# Altium PCB XRACER-R07.pcbdoc (part 1 of 2)
Units mm, origin at the board's own origin, x right, y up, seen from the top; angles counter-clockwise.
Board outline 50.7 x 52.3 mm, 4 copper layers (Top Layer, 2, 3, Bottom Layer); 135 components, 122 nets, 557 pads, 407 vias.
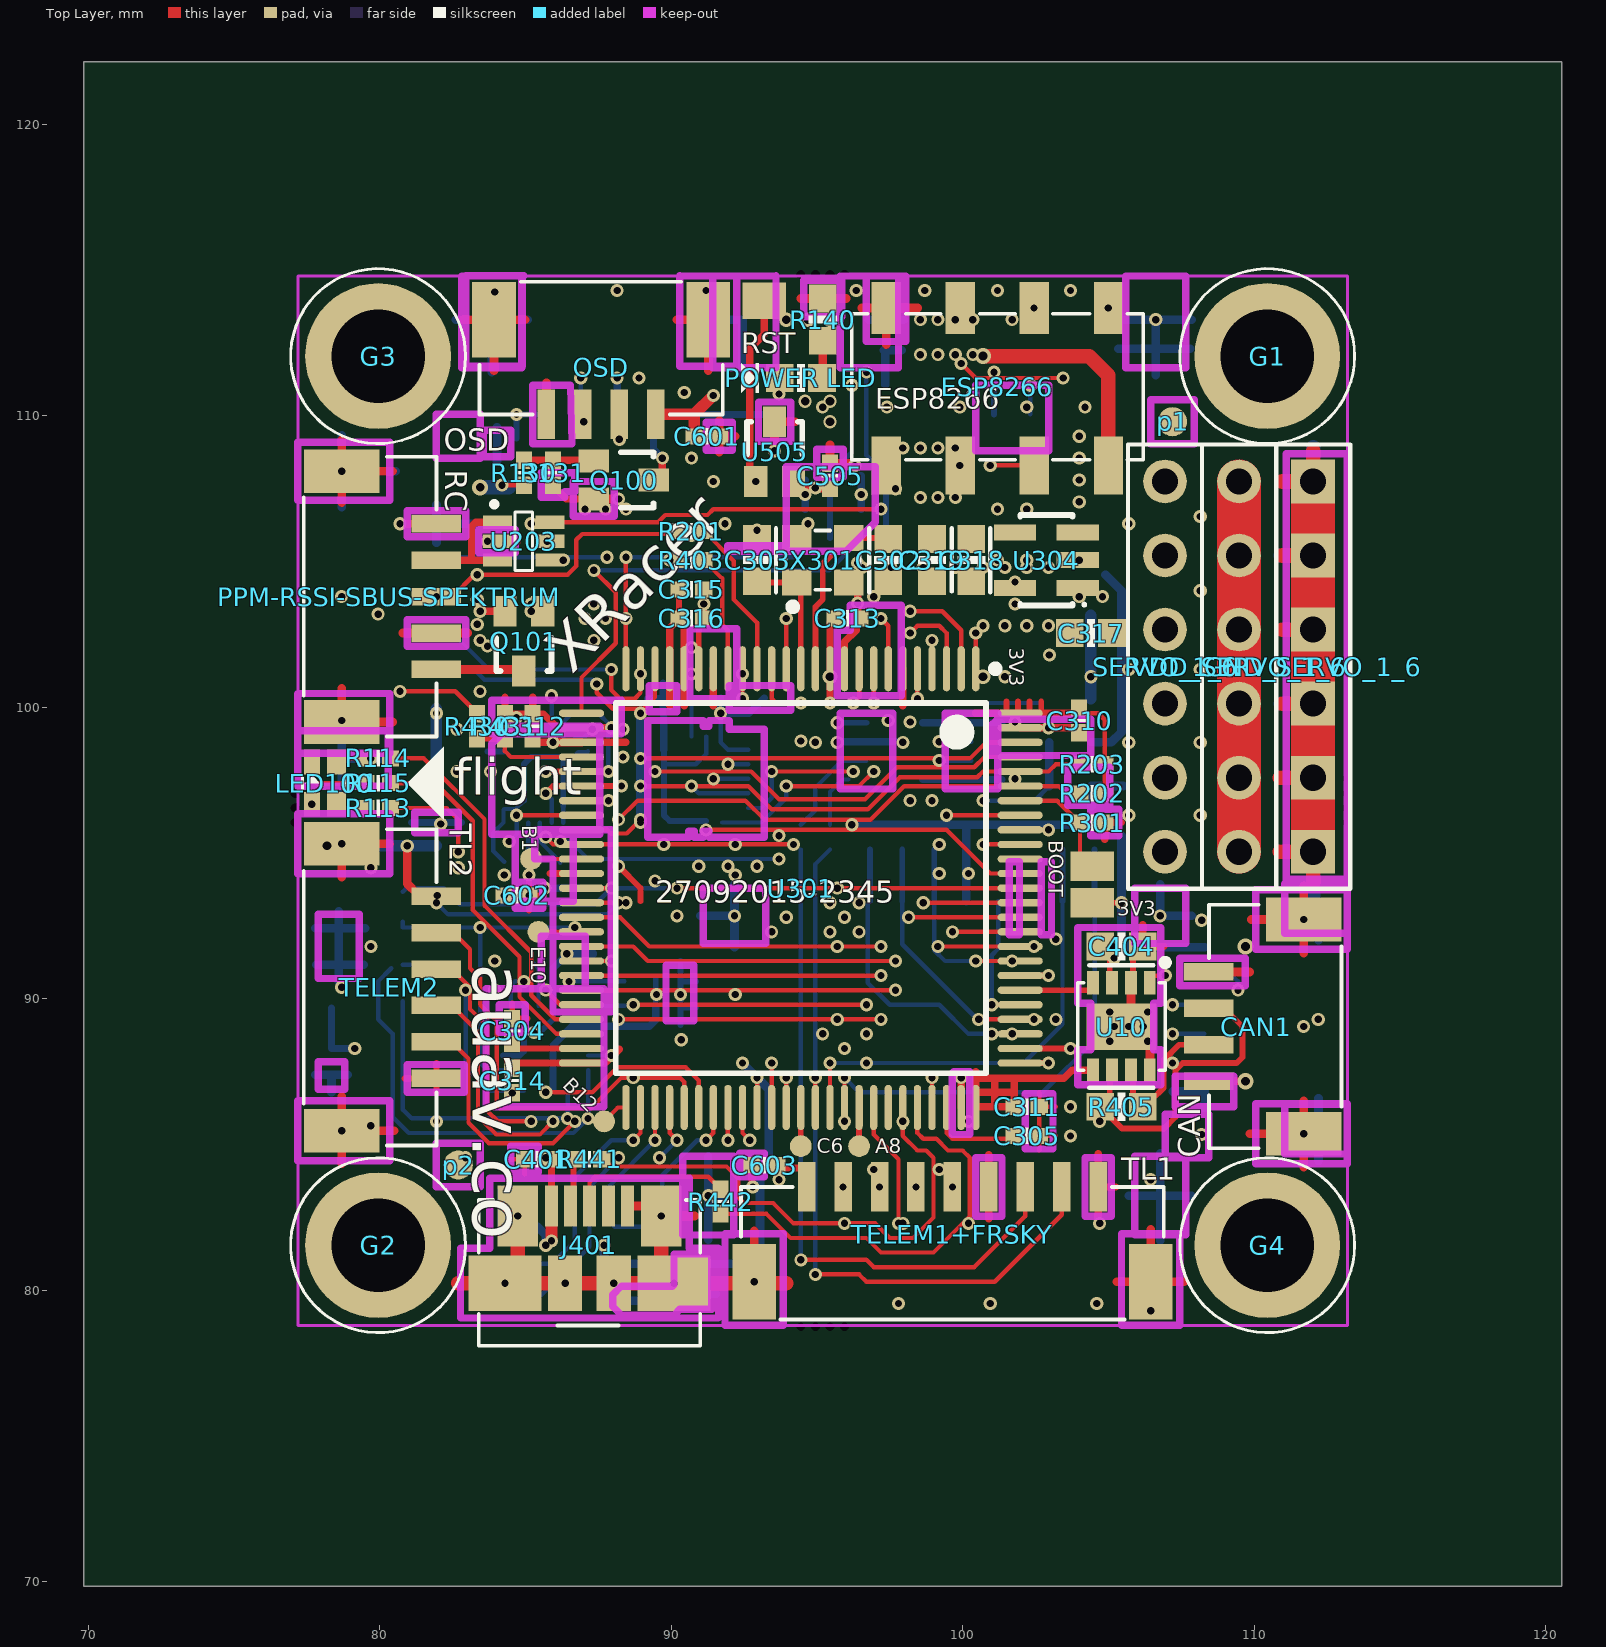
[diagram p0: Top Layer view]
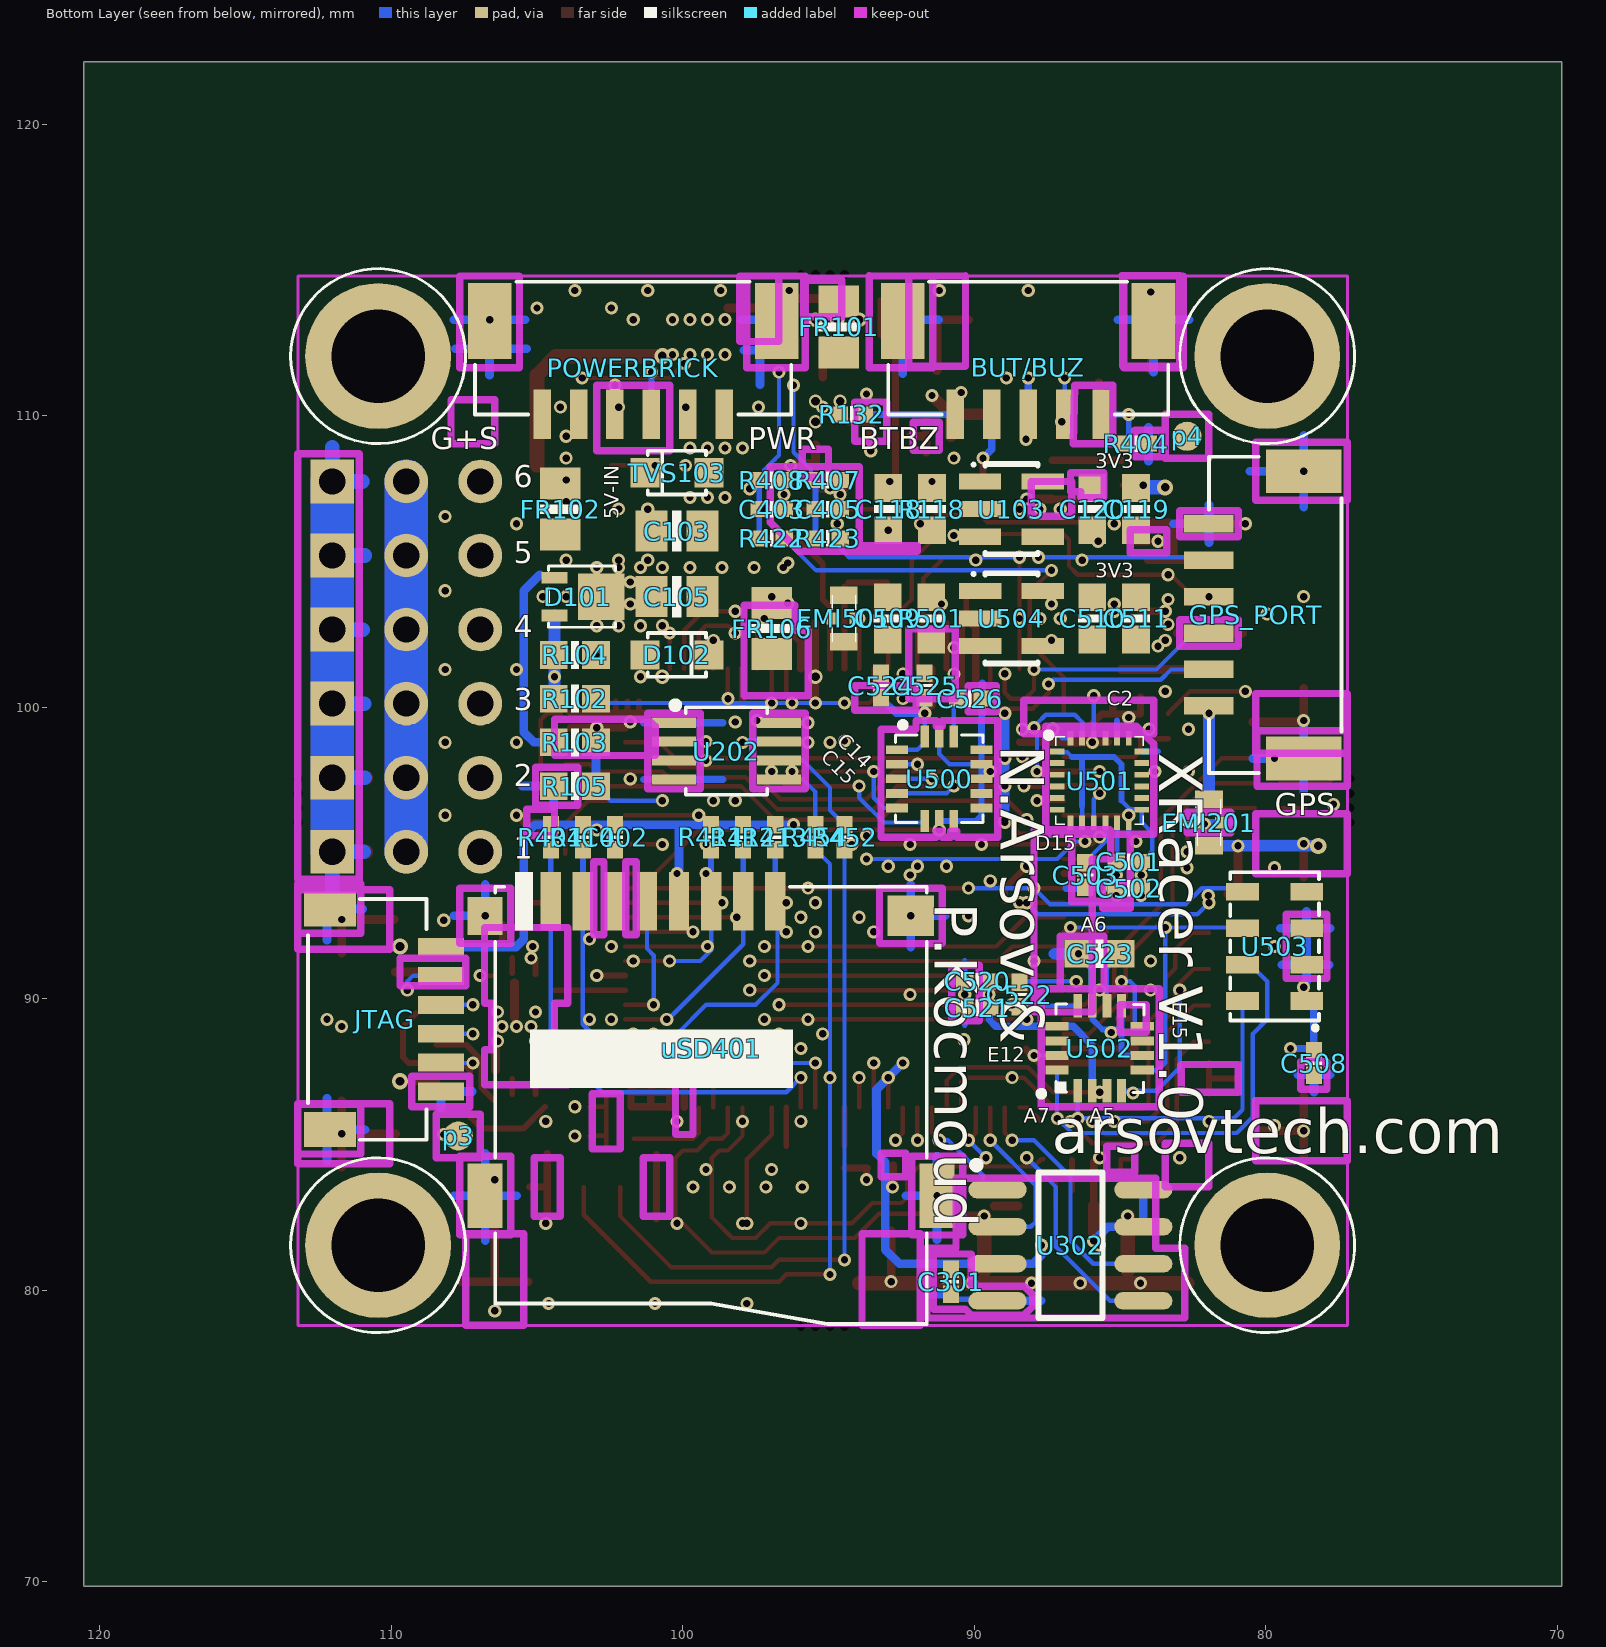
[diagram p1: Bottom Layer view, seen from below]
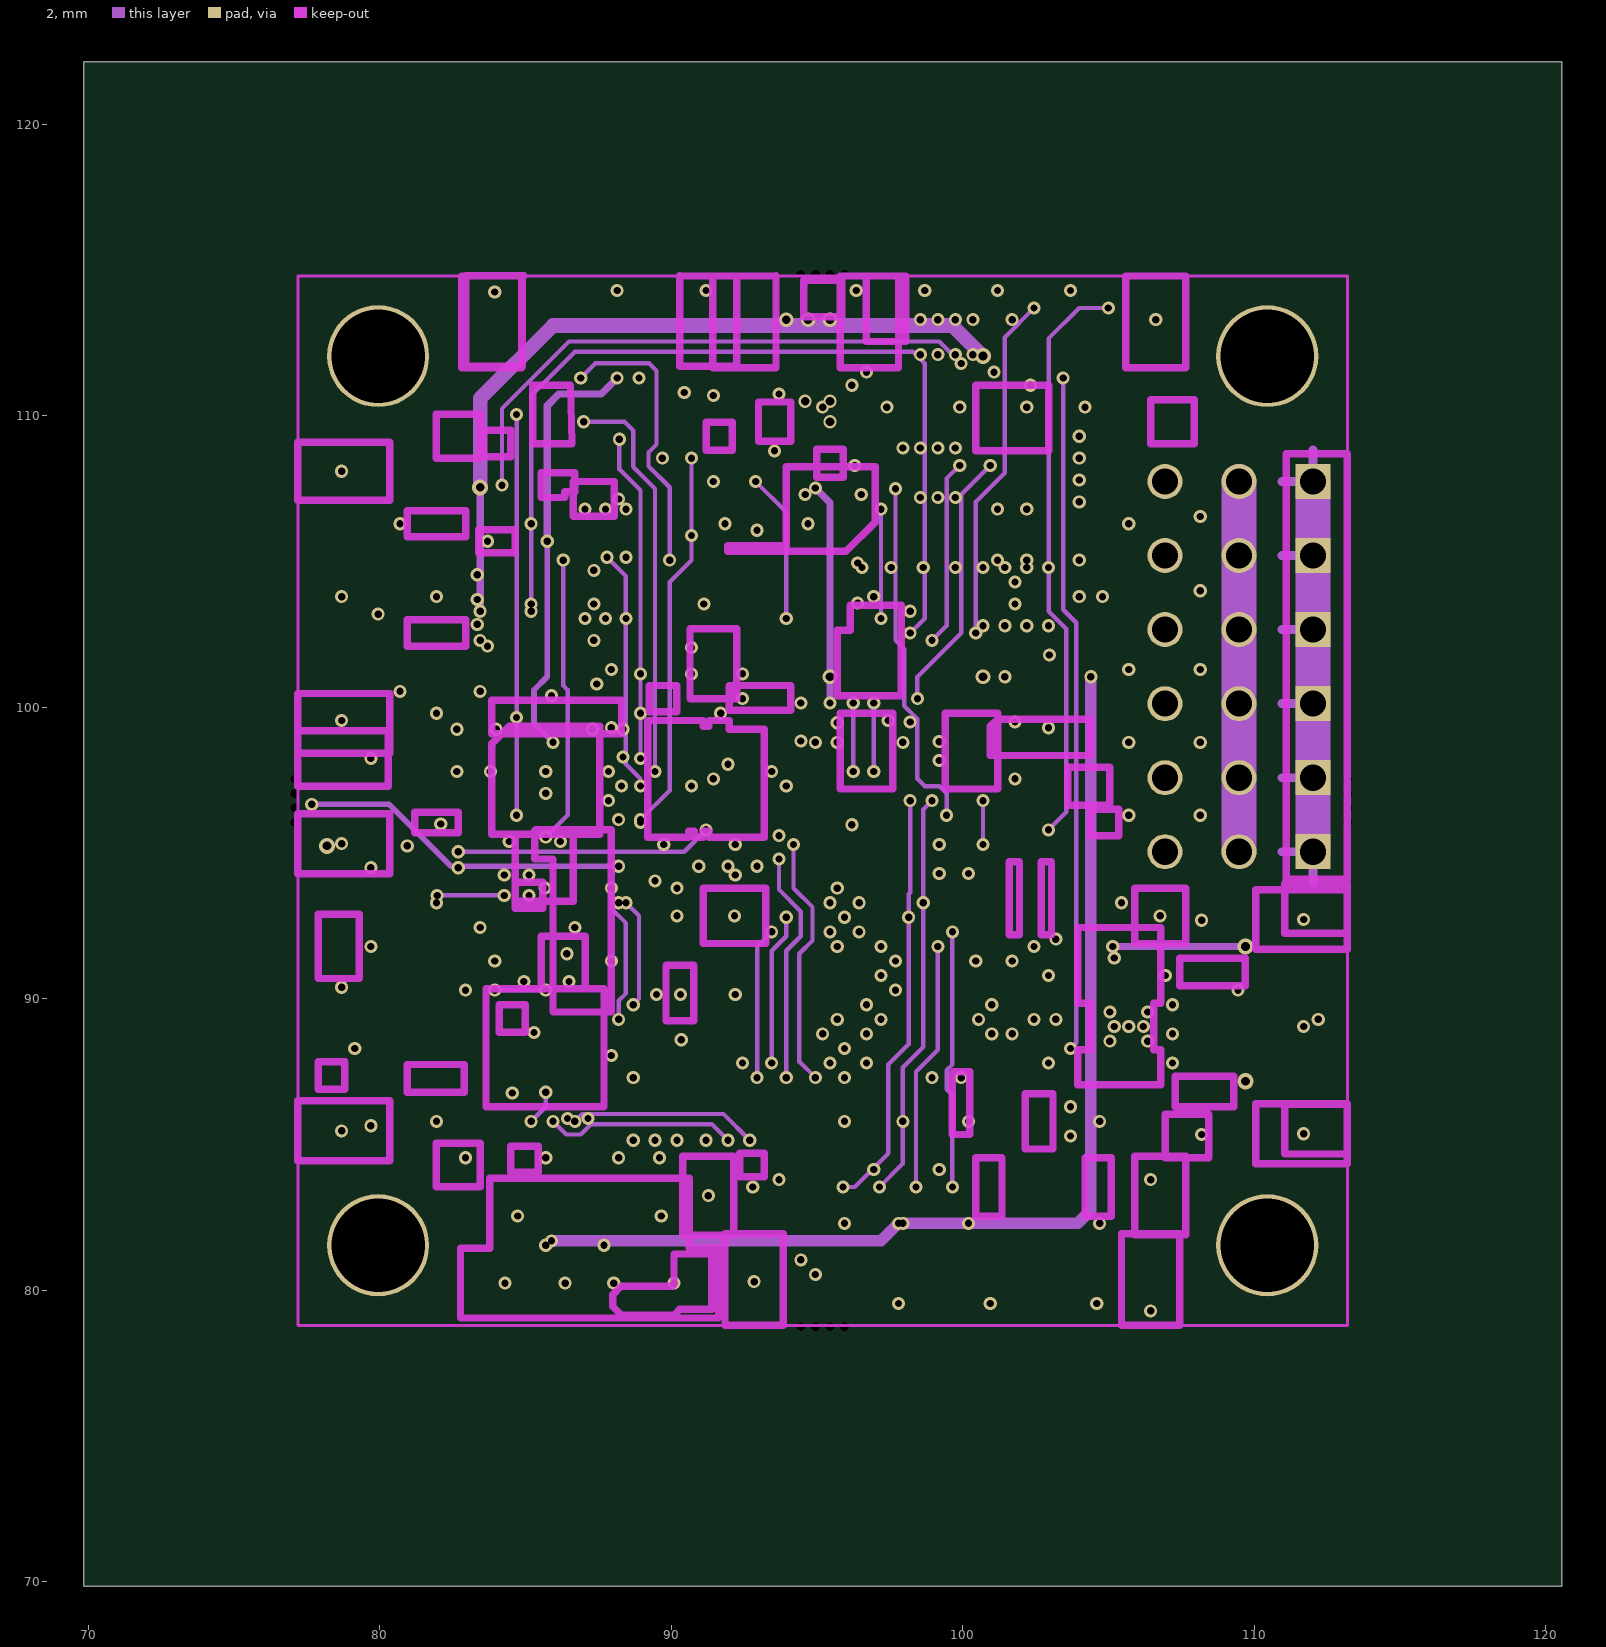
[diagram p2: 2]
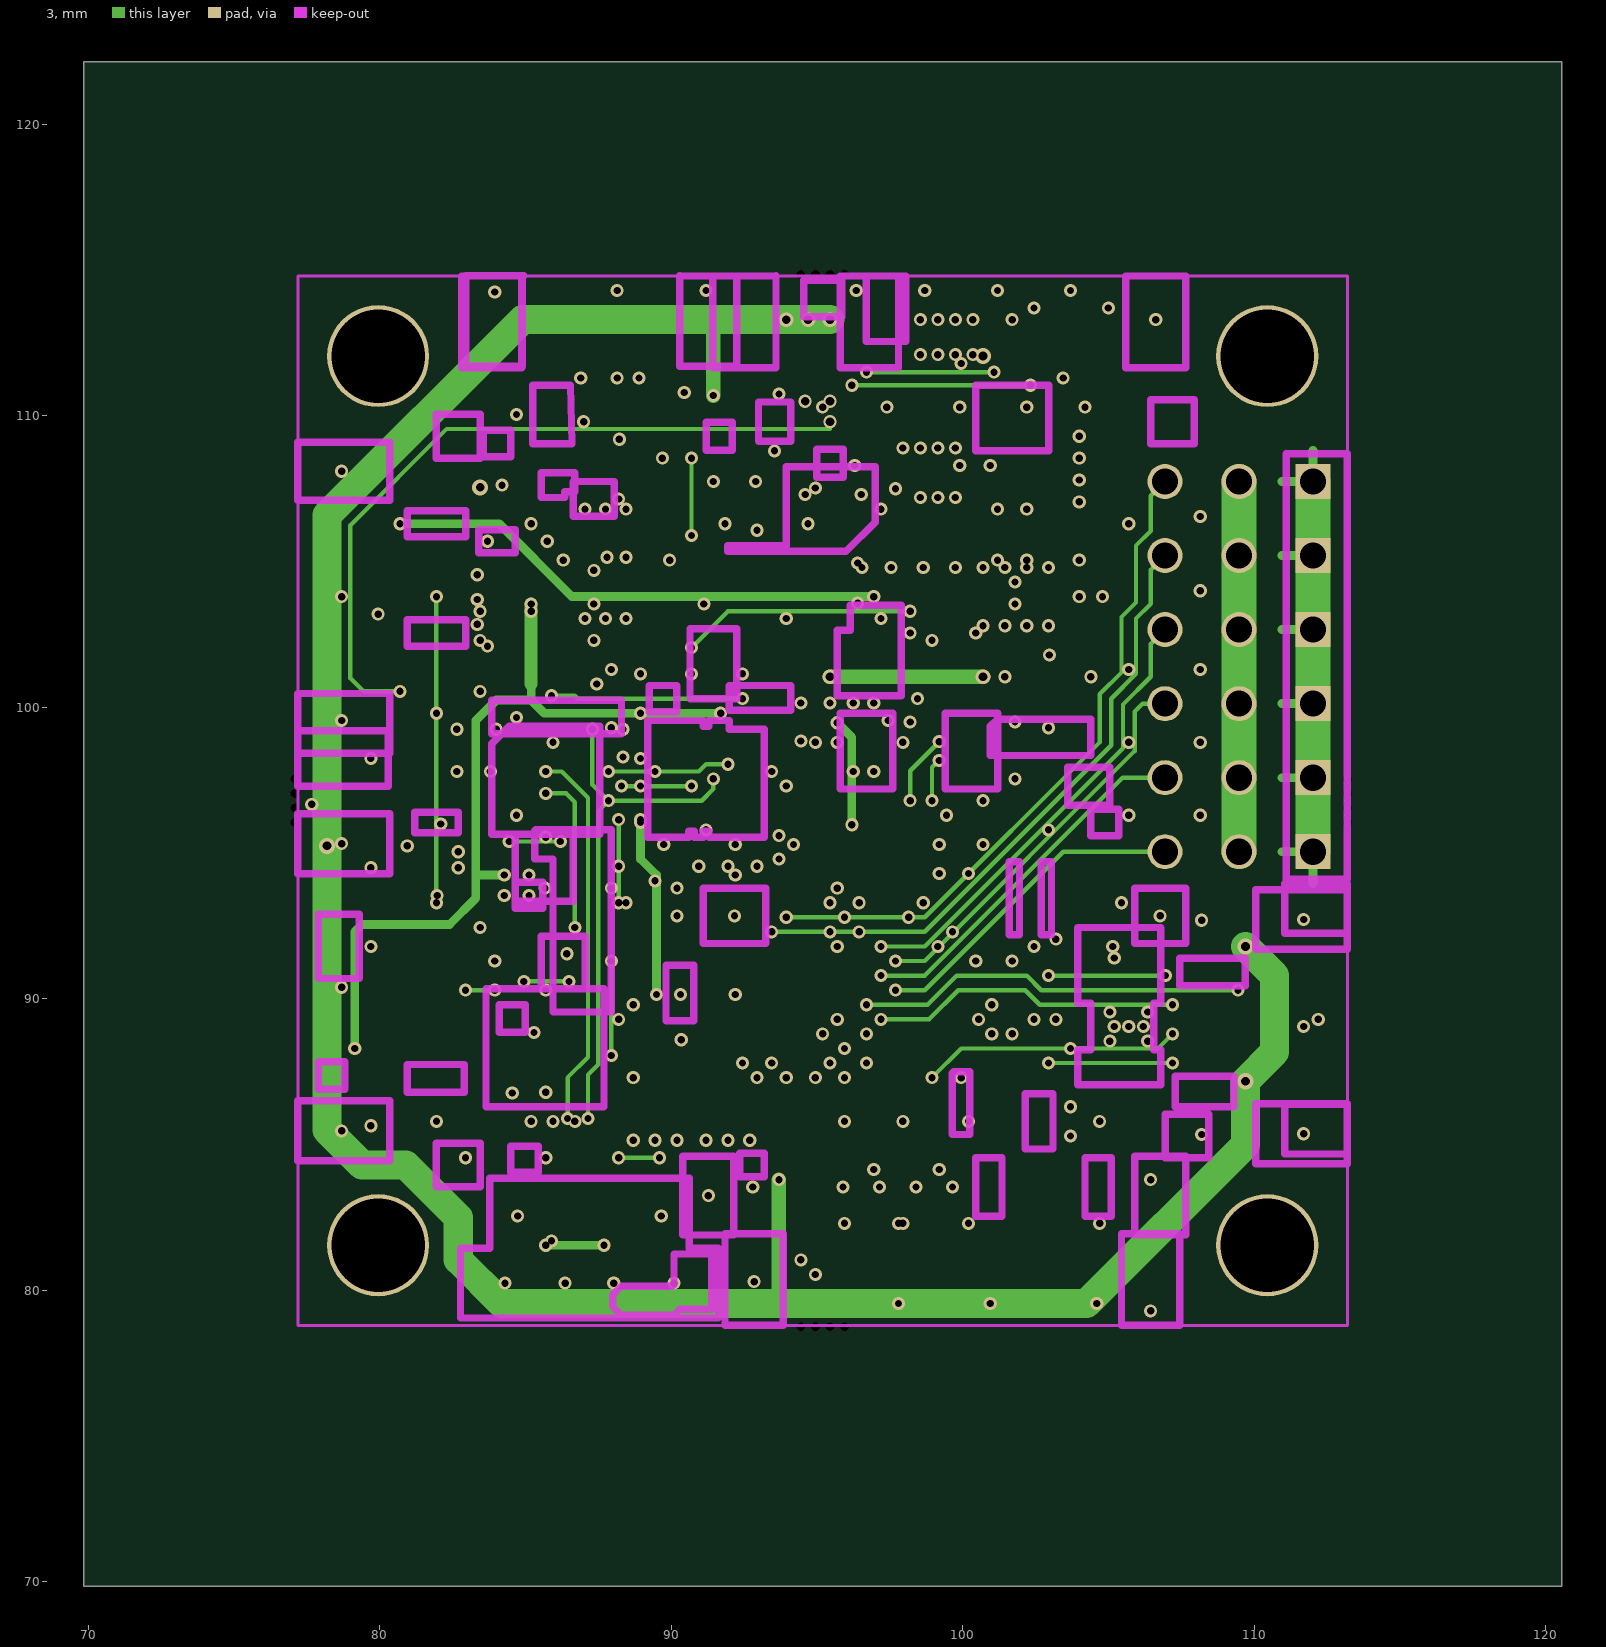
[diagram p3: 3]

## Layer stack, top to bottom
Top Layer: signal copper (thickness not stored)
Dielectric: dielectric 0.32, FR-4, Dk 4.8
2: signal copper (thickness not stored)
Dielectric: dielectric 0.32, FR-4, Dk 4.8
3: signal copper (thickness not stored)
Dielectric: dielectric 0.32, FR-4, Dk 4.8
Bottom Layer: signal copper (thickness not stored)

## Board outline
120.55,69.85 69.85,69.85 69.85,122.15 120.55,122.15

## Design rules (kind name [scope] priority, off if disabled: settings)
BoardOutlineClearance Clearance [All] p0: genericclearance=0.254 ignorepadtopadclearanceinfootprint=FALSE except(0: Arc-SplitContinuation Track-SplitContinuation SMDPad-SplitContinuation THPad-SplitContinuation Via-SplitContinuation Fill-SplitContinuation Poly-SplitContinuation Region-SplitContinuation Text-SplitContinuation; 0.15: Track-OutlineEdge SMDPad-OutlineEdge THPad-OutlineEdge Via-OutlineEdge Fill-OutlineEdge Poly-OutlineEdge Text-OutlineEdge Hole-OutlineEdge; 0.254: Region-OutlineEdge Sheet-OutlineEdge Track-CutoutEdge SMDPad-CutoutEdge THPad-CutoutEdge Via-CutoutEdge Fill-CutoutEdge Region-CutoutEdge Poly-CutoutEdge Text-CutoutEdge Sheet-CutoutEdge Hole-CutoutEdge)
Clearance [All] p1: gap=0.178 ignorepadtopadclearanceinfootprint=FALSE except(0.15: Sheet-Track Sheet-SMDPad Sheet-THPad Sheet-Via Sheet-Fill Sheet-Poly Sheet-Text Track-Sheet SMDPad-Sheet THPad-Sheet Via-Sheet Fill-Sheet Poly-Sheet Text-Sheet Hole-Sheet Sheet-Hole; 0.254: Track-Track SMDPad-Track THPad-Track Via-Track Fill-Track Region-Track Poly-Track Text-Track Hole-Track Track-SMDPad SMDPad-SMDPad THPad-SMDPad Via-SMDPad Fill-SMDPad Region-SMDPad Poly-SMDPad Text-SMDPad Hole-SMDPad Track-THPad SMDPad-THPad THPad-THPad Via-THPad Fill-THPad Region-THPad Poly-THPad Text-THPad Hole-THPad Track-Via SMDPad-Via THPad-Via Via-Via Fill-Via Region-Via Poly-Via Text-Via Hole-Via Track-Fill SMDPad-Fill THPad-Fill Via-Fill Fill-Fill Region-Fill Poly-Fill Text-Fill Hole-Fill Track-Region SMDPad-Region THPad-Region Via-Region Fill-Region Region-Region Poly-Region Text-Region Sheet-Region Hole-Region Track-Poly SMDPad-Poly THPad-Poly Via-Poly Fill-Poly Region-Poly Poly-Poly Text-Poly Hole-Poly Track-Text SMDPad-Text THPad-Text Via-Text Fill-Text Region-Text Poly-Text Text-Text Hole-Text Region-Sheet Sheet-Sheet Track-Hole SMDPad-Hole THPad-Hole Via-Hole Fill-Hole Region-Hole Poly-Hole Text-Hole Hole-Hole)
PlaneConnect [All] p1: planeconnectstyle=Relief reliefexpansion=0.508 reliefentries=4 reliefconductorwidth=0 reliefairgap=0.025
PolygonConnect [All] p1: connectstyle=Direct reliefentries=4 reliefconductorwidth=11.811 polygonreliefangle="90 Angle" airgapwidth=10
RoutingVias [All] p1: viastyle="Through Hole" holewidth=9.8425 minholewidth=9.8425 maxholewidth=9.8425 width=17.7165 minwidth=17.7165 maxwidth=17.7165
SolderMaskExpansion [All] p1: useseparateexpansions=TRUE expansion=1.9685 expansionbottom=1.9685
Width [All] p1: maxlimit=6 minlimit=6 preferedwidth=6
1 further rules are at their usual default settings.

## Components (designator, comment, footprint, x,y, rotation, side; value= is the part's Value field where it differs from the comment)
3V3 "3V3" PAD1#1 104.45,93.3 r180 top
A8 "BOOT" PAD1#2 96.45,84.95 r0 top
B1 "BOOT" PAD1#2 85.2,94.8 r0 top
B12 "BOOT" PAD1#2 87.7,85.8 r90 top
BOOT "BOOT" PAD1#1 104.45,94.55 r0 top
BUT/BUZ "ClickMate" Molex_Clik_1.25_5H#1 88.15,110.05 r180 bottom locked
C6 "BOOT" PAD1#2 94.45,84.95 r0 top
C103 "100uF 10V" 0805A 100.2,106.05 r180 bottom
C105 "100uF 10V" 0805A 100.2,103.8 r180 bottom
C118 "10uF 10V" 0603A 92.95,106.803 r90 bottom
C119 "10uF 6.3V" 0603A 84.45,106.803 r90 bottom
C120 "100n" 0603A 85.95,106.803 r90 bottom
C301 "100n" 0402A 90.8,80.3 r270 bottom
C302 "8p" 0603A 97.45,105.05 r90 top
C303 "8p" 0603A 92.95,105.05 r270 top
C304 "2u2" 0402A 84.55,88.9 r270 top
C305 "2u2" 0402A 102.2,85.3 r180 top
C310 "100n" 0402A 104,99.55 r270 top
C311 "100n" 0402A 102.2,86.3 r0 top
C312 "100n" 0402A 85.25,99.35 r90 top
C313 "100n" 0402A 96.05,103.05 r0 top
C314 "100n" 0402A 84.55,87.2 r270 top
C315 "2u2" 0402A 90.7,104.05 r0 top
C316 "2u2" 0402A 90.7,103.05 r0 top
C317 "2u2" 0603A 104.4,102.55 r0 top
C318 "100n" 0603A 100.3,105.05 r270 top
C319 "10u" 0603A 98.95,105.05 r270 top
C401 "100n" 0402A 85.4,84.5 r180 top
C402 "100n" 0402A 102.327,95.55 r90 bottom locked
C403 "100n" 0402A 96.95,106.8 r0 bottom
C404 "2u2" 0603A 105.45,91.8 r180 top
C405 "100n" 0402A 95.025,106.8 r0 bottom
C501 "2u2" 0402A 84.7,94.7 r0 bottom
C502 "100n" 0402A 84.7,93.8 r0 bottom
C503 "100n" 0402A 86.2,94.25 r270 bottom
C505 "100n" 0402A 95.45,107.95 r90 top
C508 "100n" 0402A 78.35,87.8 r270 bottom
C509 "2u2" 0603A 92.973,103.05 r90 bottom
C510 "100n" 0603A 85.95,103.053 r90 bottom
C511 "10u" 0603A 84.45,103.053 r90 bottom
C520 "2u2" 0402A 89.9,90.6 r0 bottom
C521 "100n" 0402A 89.9,89.7 r0 bottom
C522 "220n" 0402A 88.45,90.15 r270 bottom
C523 "4u7" 0603A 85.7,91.55 r180 bottom
C524 "2u2" 0402A 93.2,100.75 r90 bottom
C525 "100n" 0402A 91.7,100.75 r90 bottom
C526 "0u47" 0402A 90.15,100.3 r180 bottom
C601 "2u2" 0402A 91.225,109.3 r180 top
C602 "2u2" 0402A 84.7,93.55 r180 top
C603 "2u2" 0402A 93.2,84.3 r0 top
CAN1 "ClickMate" Molex_1.25_click_4#1 108.45,89.05 r270 top locked
D101 "PMEG2020CP" pmeg2020cp 103.2,103.8 r90 bottom
D102 "PMEG1030" SOD323F 100.2,101.8 r180 bottom
E10 "BOOT" PAD1#2 85.45,92.3 r225 top
EMI201 "EMI_KNH16" EMI_KNH16_0603 81.95,96.05 r90 bottom
EMI501 "EMI_KNH16" EMI_KNH16_0603 94.473,103.05 r90 bottom
ESP8266 "2x4 0.1\"" 2.54MM_2X4_SMD_FEMALE 101.2,111 r0 top
FR101 "1A RST FUSE" 0805A 94.65,113.05 r270 bottom
FR102 "2A RST FUSE" 0805A 104.2,106.8 r90 bottom
FR106 "0.3A RST FUSE" 0805A 96.95,102.7 r270 bottom
G1 "GND" SMT_PAD_ROUND#1 111.123,112.747 r0 top locked
G2 "GND" SMT_PAD_ROUND#2 80.773,82.297 r0 top locked
G3 "GND" SMT_PAD_ROUND#3 79.623,112.747 r0 top locked
G4 "GND" SMT_PAD_ROUND#4 110.928,80.702 r0 top locked
GND_SERVO_1_6 "Header 6" HDR1X6#1 112.023,95.05 r90 top locked
GPS_PORT "ClikMate" Molex_Clok_1.25_6H#1 81.95,103.175 r270 bottom locked
J401 "miniUSB" USBmicro_B 87.2,78.8 r0 top locked
JTAG "JST SM06B" SM06B-SRSH-TB 110.25,89.3 r90 bottom locked
LED100 "LTST-C19HE1WT" LTST-C19HE1WT 78.1,97.4 r0 top
OSD "ClickMate" Molex_1.25_click_4#2 87.6,110.05 r0 top locked
p1 "SMT_PAD" SMT_PAD 107.2,109.8 r270 top
p2 "SMT_PAD" SMT_PAD 82.7,84.3 r270 top
p3 "SMT_PAD" SMT_PAD 107.7,85.3 r90 bottom
p4 "SMT_PAD" SMT_PAD 82.7,109.3 r90 bottom
"POWER LED" "GREEN" 0603A 94.45,111.3 r0 top
POWERBRICK "ClickMate" Molex_Clok_1.25_6H#2 101.7,110.05 r180 bottom locked
PPM-RSSI-SBUS-SPEKTRUM "ClikMate" Molex_Clik_1.25_5H#2 81.95,103.8 r90 top locked
Q100 "DMG1012UW" 2N7002-SOT323 87.35,108.45 r270 top
Q101 "BSS223PW" 2N7002-SOT323 85.6,103.3 r180 top
R102 "10K" 0603A 103.7,100.3 r0 bottom
R103 "10K" 0603A 103.7,98.8 r180 bottom
R104 "1K" 0603A 103.7,101.8 r0 bottom
R105 "10K" 0603A 103.7,97.3 r0 bottom
R113 "100R" 0402A 79.95,96.55 r0 top
R114 "100R" 0402A 79.95,98.25 r0 top
R115 "100R" 0402A 79.95,97.4 r0 top
R118 "10k" 0603A 91.45,106.803 r90 bottom
R130 "10k" 0402A 84.95,108.05 r90 top
R131 "10k" 0402A 85.95,108.05 r90 top
R132 "0R0" 0402A 94.2,110.05 r180 bottom
R140 "220R" 0603A 95.2,113.3 r270 top
R201 "10K" 0402A 90.7,106.05 r180 top
R202 "2k2" 0402A 104.45,97.05 r0 top locked
R203 "2k2" 0402A 104.45,98.05 r0 top locked
R301 "10k" 0402A 104.45,96.05 r180 top
R401 "100k" 0402A 104.527,95.55 r270 bottom locked
R403 "68R" 0402A 90.7,105.05 r180 top
R404 "1K5" 0402A 84.45,109.05 r0 bottom
R405 "120R" 0603A 105.45,86.3 r180 top
R407 "1M" 0402A 95.025,107.8 r0 bottom
R408 "1M" 0402A 96.95,107.8 r0 bottom
R410 "100k" 0402A 103.427,95.55 r270 bottom locked
R411 "100k" 0402A 99.027,95.55 r270 bottom locked
R412 "100k" 0402A 97.927,95.55 r270 bottom locked
R413 "100k" 0402A 96.827,95.55 r270 bottom locked
R422 "10k" 0402A 96.95,105.8 r180 bottom
R423 "10k" 0402A 95.025,105.8 r180 bottom
R430 "10k" 0402A 83.35,99.35 r270 top
R431 "10k" 0402A 84.3,99.35 r270 top
R441 "22R" 0402A 87.2,84.5 r180 top
R442 "22R" 0402A 91.7,83.05 r90 top
R452 "1k" 0402A 94.45,95.55 r270 bottom
R454 "1k" 0402A 95.45,95.55 r270 bottom
R501 "10k" 0603A 91.473,103.05 r90 bottom
RST "BOOT" PAD1#3 93.2,113.95 r90 top
SERVO_1_6 "Header 6" HDR1X6#2 106.943,95.05 r90 top locked
TELEM1+FRSKY "ClikMate" Molex_Click_1.25_9H 99.65,83.55 r180 top
TELEM2 "ClikMate" Molex_Clok_1.25_6H#1 81.95,90.4 r90 top locked
TVS103 "5.6V" SOD323F 100.2,108.05 r0 bottom
U10 "TJA1051T" 8DFN_3x3 105.45,89.05 r180 top
U103 "AP7365-33WG-7" SOT23-5 88.725,106.803 r270 bottom
U202 "74LVC2G240" ssop-8 98.5,98.5 r180 bottom
U203 "74LVC1G57" sot323-6 84.95,105.7 r270 top
U301 "STM32F427VIT6" LQFP100_L 94.45,93.8 r270 top locked
U302 "FM25V02-G" SO-8_N 86.7,81.55 r180 bottom locked
U304 "LP5907-Q1" SOT23-5 102.875,105.05 r90 top locked
U500 "ICM-20608-G" HCLGA-16L 91.202,97.55 r180 bottom
U501 "MPU9250/6500" MPU6500-9250 85.7,97.491 r180 bottom
U502 "HMC5983" HMC5883L 85.7,88.309 r90 bottom
U503 "MS5611" MS5611 79.7,91.8 r0 bottom
U504 "LP5907-Q1" SOT23-5 88.723,103.05 r270 bottom
U505 "MCP131" SOT-323 93.55,108.775 r0 top
uSD401 "MicroSD" MicroSD_China_01 99.027,82.85 r180 bottom locked
VDD_SERVO_1_6 "Header 6" HDR1X6#2 109.483,95.05 r90 top locked
X301 "24MHz" Crystal_2.5x2 95.2,105.05 r0 top

## Footprints (in the part's own frame and the unit in brackets; to place one, negate y for a bottom-side part, rotate by r counter-clockwise, add the part's x,y. Pads: shape width x height; smd on the part's side, far side on the other; paste and mask are expansions set on the pad)
2.54MM_2X4_SMD_FEMALE [mm]
  rect 1x2 smd: 1(-3.82,-2.7) 3(-1.28,-2.7) 5(1.26,-2.7) 7(3.8,-2.7)
  rect 1x1.78 smd: 2(-3.82,2.7) 4(-1.28,2.7) 6(1.26,2.7) 8(3.8,2.7)
  silkscreen extent -5,-2.5 5,2.5
2N7002-SOT323 [mm]
  rect 0.8x1.05 smd: 1(0.65,2.05) 2(1.3,0) 3(0,0)
  silkscreen extent -0.3,0.93 1.6,2.05
8DFN_3x3 [mm]
  rect 0.4x0.8 smd: 1(-0.975,-1.5) 2(-0.325,-1.5) 3(0.325,-1.5) 4(0.975,-1.5) 5(0.975,1.5) 6(0.325,1.5) 7(-0.325,1.5) 8(-0.975,1.5)
  rect 2.4x1.6 smd: EP(0,0)
  silkscreen extent -1.6,-2.3 1.5,1.5
0402A [mm]
  rect 0.6x0.55 smd: 1(0.425,0) 2(-0.425,0)
  silkscreen extent -0.05,-0.28 0.05,0.28
0603A [mm]
  rect 0.95x0.95 smd: 1(-0.725,0) 2(0.725,0)
  silkscreen extent -0.13,-0.47 0.13,0.48
0805A [mm]
  rect 1.1x1.4 smd: 1(0.875,0) 2(-0.875,0)
  silkscreen extent -0.15,-0.7 0.15,0.7
Crystal_2.5x2 [mil]
  rect 40x35 smd: 1(-35,-30) 2(35,-30) 3(35,30) 4(-35,30)
  silkscreen extent -50,-68 50,40
EMI_KNH16_0603 [mm]
  rect 0.6x0.95 smd: 1(-0.8,0) 2(0.8,0)
  rect 0.4x0.4 smd: 3(0,0.4) 4(0,-0.4)
  silkscreen extent -0.8,-0.4 0.8,0.4
HCLGA-16L [mm]
  rect 0.75x0.3 smd: 1(-1.45,1) 2(-1.45,0.5) 3(-1.45,0) 4(-1.45,-0.5) 5(-1.45,-1) 9(1.45,-1) 10(1.45,-0.5) 11(1.45,0) 12(1.45,0.5) 13(1.45,1)
  rect 0.3x0.75 smd: 6(-0.5,-1.45) 7(0,-1.45) 8(0.5,-1.45) 14(0.5,1.45) 15(0,1.45) 16(-0.5,1.45)
  silkscreen extent -1.5,-1.5 1.5,1.95
HDR1X6#1 [mm]
  rect 1.5x1.5 / inner rect 1.2x1.2 / far side rect 1.5x1.5 hole 0.9: 1(0,0) 2(2.54,0) 3(5.08,0) 4(7.62,0) 5(10.16,0) 6(12.7,0)
  silkscreen extent -1.27,-1.27 13.97,1.27
HDR1X6#2 [mm]
  round 1.5 / inner round 1.2 / far side round 1.5 hole 0.9: 1(0,0) 2(2.54,0) 3(5.08,0) 4(7.62,0) 5(10.16,0) 6(12.7,0)
  silkscreen extent -1.27,-1.27 13.97,1.27
HMC5883L [mil]
  rect 31.5x11.81 smd: 1(-57.5,29.52) 2(-57.5,9.84) 3(-57.5,-9.84) 4(-57.5,-29.53) 9(57.5,-29.53) 10(57.5,-9.84) 11(57.5,9.84) 12(57.5,29.52)
  rect 11.81x31.5 smd: 5(-29.53,-57.5) 6(-9.84,-57.5) 7(9.84,-57.5) 8(29.53,-57.5) 13(29.53,57.5) 14(9.84,57.5) 15(-9.84,57.5) 16(-29.53,57.5)
  silkscreen extent -65,-60 60,83
LQFP100_L [mm]
  oval 1.55x0.25 smd: 1(-7.525,6) 2(-7.525,5.5) 3(-7.525,5) 4(-7.525,4.5) 5(-7.525,4) 6(-7.525,3.5) 7(-7.525,3) 8(-7.525,2.5) 9(-7.525,2) 10(-7.525,1.5) 11(-7.525,1) 12(-7.525,0.5) 13(-7.525,0) 14(-7.525,-0.5) 15(-7.525,-1) 16(-7.525,-1.5) 17(-7.525,-2) 18(-7.525,-2.5) 19(-7.525,-3) 20(-7.525,-3.5) 21(-7.525,-4) 22(-7.525,-4.5) 23(-7.525,-5) 24(-7.525,-5.5) 25(-7.525,-6) 51(7.525,-6) 52(7.525,-5.5) 53(7.525,-5) 54(7.525,-4.5) 55(7.525,-4) 56(7.525,-3.5) 57(7.525,-3) 58(7.525,-2.5) 59(7.525,-2) 60(7.525,-1.5) 61(7.525,-1) 62(7.525,-0.5) 63(7.525,0) 64(7.525,0.5) 65(7.525,1) 66(7.525,1.5) 67(7.525,2) 68(7.525,2.5) 69(7.525,3) 70(7.525,3.5) 71(7.525,4) 72(7.525,4.5) 73(7.525,5) 74(7.525,5.5) 75(7.525,6)
  oval 0.25x1.55 smd: 26(-6,-7.525) 27(-5.5,-7.525) 28(-5,-7.525) 29(-4.5,-7.525) 30(-4,-7.525) 31(-3.5,-7.525) 32(-3,-7.525) 33(-2.5,-7.525) 34(-2,-7.525) 35(-1.5,-7.525) 36(-1,-7.525) 37(-0.5,-7.525) 38(0,-7.525) 39(0.5,-7.525) 40(1,-7.525) 41(1.5,-7.525) 42(2,-7.525) 43(2.5,-7.525) 44(3,-7.525) 45(3.5,-7.525) 46(4,-7.525) 47(4.5,-7.525) 48(5,-7.525) 49(5.5,-7.525) 50(6,-7.525) 76(6,7.525) 77(5.5,7.525) 78(5,7.525) 79(4.5,7.525) 80(4,7.525) 81(3.5,7.525) 82(3,7.525) 83(2.5,7.525) 84(2,7.525) 85(1.5,7.525) 86(1,7.525) 87(0.5,7.525) 88(0,7.525) 89(-0.5,7.525) 90(-1,7.525) 91(-1.5,7.525) 92(-2,7.525) 93(-2.5,7.525) 94(-3,7.525) 95(-3.5,7.525) 96(-4,7.525) 97(-4.5,7.525) 98(-5,7.525) 99(-5.5,7.525) 100(-6,7.525)
  silkscreen extent -7.65,-6.35 6.35,6.8
LTST-C19HE1WT [mm]
  rect 0.55x0.85 smd: 1(-0.425,0.725) 4(-0.425,-0.725)
  rect 0.65x0.85 smd: 2(0.425,0.725) 3(0.425,-0.725)
  silkscreen extent -0.75,-0.2 0.75,0.2
MicroSD_China_01 [mm]
  rect 0.7x2 smd: 1(2.2,10.5) 2(1.1,10.5) 3(0,10.5) 4(-1.1,10.5) 5(-2.2,10.5) 6(-3.3,10.5) 7(-4.4,10.5) 8(-5.5,10.5)
  rect 0x0 smd: 9(-6.6,10.5)
  rect 1.2x2.2 smd: GND(-7.75,0.4) GND(7.75,0.4)
  rect 1.2x1.3 smd: GND(-7.75,10)
  rect 1.6x1.4 smd: GND(6.85,10)
  silkscreen extent -7.4,-4 7.4,11
Molex_1.25_click_4#1 [mm]
  rect 0.6x1.7 smd: 1(1.875,0) 2(0.625,0) 3(-0.625,0) 4(-1.875,0)
  rect 1.5x2.6 smd: GND(-3.675,3.25) GND(3.675,3.25)
  silkscreen extent -4.18,0 4.18,4.55
Molex_1.25_click_4#2 [mm]
  rect 0.6x1.7 smd: 1(1.875,0) 2(0.625,0) 3(-0.625,0) 4(-1.875,0)
  rect 1.5x2.58 smd: GND(-3.675,3.25) GND(3.675,3.25)
  silkscreen extent -4.18,0 4.18,4.55
Molex_Click_1.25_9H [mm]
  rect 0.6x1.7 smd: 1(5,0) 2(3.75,0) 3(2.5,0) 4(1.25,0) 5(0,0) 6(-1.25,0) 7(-2.5,0) 8(-3.75,0) 9(-5,0)
  rect 1.5x2.6 smd: GND(-6.8,3.25) GND(6.8,3.25)
  silkscreen extent -7.25,0 7.25,4.55
Molex_Clik_1.25_5H#1 [mm]
  rect 0.6x1.7 smd: 1(2.5,0) 2(1.25,0) 3(0,0) 4(-1.25,0) 5(-2.5,0)
  rect 1.5x2.6 smd: GND(-4.3,3.2) GND(4.3,3.2)
  silkscreen extent -4.8,0 4.8,4.55
Molex_Clik_1.25_5H#2 [mm]
  rect 0.6x1.7 smd: 1(2.5,0) 2(1.25,0) 3(0,0) 4(-1.25,0) 5(-2.5,0)
  rect 1.5x2.6 smd: GND(-4.3,3.25) GND(4.3,3.25)
  silkscreen extent -4.8,0 4.8,4.55
Molex_Clok_1.25_6H#1 [mm]
  rect 0.6x1.7 smd: 1(3.125,0) 2(1.875,0) 3(0.625,0) 4(-0.625,0) 5(-1.875,0) 6(-3.125,0)
  rect 1.5x2.6 smd: GND(-4.925,3.25) GND(4.925,3.25)
  silkscreen extent -5.43,0 5.43,4.55
Molex_Clok_1.25_6H#2 [mm]
  rect 0.6x1.7 smd: 1(3.125,0) 2(1.875,0) 3(0.625,0) 4(-0.625,0) 5(-1.875,0) 6(-3.125,0)
  rect 1.5x2.6 smd: GND(-4.925,3.2) GND(4.925,3.2)
  silkscreen extent -5.43,0 5.43,4.55
MPU6500-9250 [mm]
  rect 0.5x0.2 smd: 1(-1.45,1) 2(-1.45,0.6) 3(-1.45,0.2) 4(-1.45,-0.2) 5(-1.45,-0.6) 6(-1.45,-1) 13(1.45,-1) 14(1.45,-0.6) 15(1.45,-0.2) 16(1.45,0.2) 17(1.45,0.6) 18(1.45,1)
  rect 0.2x0.5 smd: 7(-1,-1.45) 8(-0.6,-1.45) 9(-0.2,-1.45) 10(0.2,-1.45) 11(0.6,-1.45) 12(1,-1.45) 19(1,1.45) 20(0.6,1.45) 21(0.2,1.45) 22(-0.2,1.45) 23(-0.6,1.45) 24(-1,1.45)
  silkscreen extent -1.85,-1.5 1.5,1.66
MS5611 [mil]
  rect 44x24 smd: 1(-43.3,73.8) 2(-43.3,24.6) 3(-43.3,-24.6) 4(-43.3,-73.8) 5(43.3,-73.8) 6(43.3,-24.6) 7(43.3,24.6) 8(43.3,73.8)
  silkscreen extent -60,-100 60,111
PAD1#1 [mm]
  rect 1.5x1 smd: 1(0,0)
PAD1#2 [mm]
  round 0.75 smd: 1(0,0)
PAD1#3 [mm]
  rect 1.25x1.5 smd: 1(0,0)
pmeg2020cp [mm]
  rect 0.4x0.9 smd: 1(-0.65,1.2) 2(0.65,1.2)
  rect 1.6x1.6 smd: 3(0,-0.4)
  silkscreen extent -1.05,-0.9 1.05,1.4
SM06B-SRSH-TB [mil]
  rect 24x62 smd: 1(97.5,-77) 2(58.5,-77) 3(19.5,-77) 4(-19.5,-77) 5(-58.5,-77) 6(-97.5,-77)
  rect 47.24x70.87 smd: GND(-149,72.83) GND(149,72.83)
  silkscreen extent -162,-58 162,102
SMT_PAD [mm]
  round 1 smd: 1(0,0)
SMT_PAD_ROUND#1 [mm]
  round 5 / inner round 3.5 / far side round 5 hole 3.2: 1(-0.673,-0.697)
SMT_PAD_ROUND#2 [mm]
  round 5 / inner round 3.5 / far side round 5 hole 3.2: 1(-0.823,-0.747)
SMT_PAD_ROUND#3 [mm]
  round 5 / inner round 3.5 / far side round 5 hole 3.2: 1(0.327,-0.697)
SMT_PAD_ROUND#4 [mm]
  round 5 / inner round 3.5 / far side round 5 hole 3.2: 1(-0.478,0.848)
SO-8_N [mm]
  oval 2x0.6 smd: 1(-2.5,1.905) 2(-2.5,0.635) 3(-2.5,-0.635) 4(-2.5,-1.905) 5(2.5,-1.905) 6(2.5,-0.635) 7(2.5,0.635) 8(2.5,1.905)
  silkscreen extent -3.35,-2.5 1.1,2.87
SOD323F [mm]
  rect 1x1 smd: 1(-1.1,0) 2(1.1,0)
  silkscreen extent -1,-0.75 1,0.75
SOT23-5 [mm]
  rect 0.55x1.45 smd: 1(-0.95,-1.075) 2(0,-1.075) 3(0.95,-1.075) 4(0.95,1.075) 5(-0.95,1.075)
  silkscreen extent -1.57,-1.35 1.55,0.9
sot323-6 [mm]
  rect 0.45x1 smd: 1(-0.65,-0.9) 2(0,-0.9) 3(0.65,-0.9) 4(0.65,0.9) 5(0,0.9) 6(-0.65,0.9)
  silkscreen extent -1.32,-1.07 1,0.3
SOT-323 [mm]
  rect 0.8x1.05 smd: 1(-0.65,-1.025) 2(0.65,-1.025) 3(0,1.025)
  silkscreen extent -0.95,-0.1 0.95,1.03
ssop-8 [mm]
  rect 1.5x0.35 smd: 1(-1.8,0.975) 2(-1.8,0.325) 3(-1.8,-0.325) 4(-1.8,-0.975) 5(1.8,-0.975) 6(1.8,-0.325) 7(1.8,0.325) 8(1.8,0.975)
  silkscreen extent -1.87,-1.5 1.4,1.68
USBmicro_B [mm]
  rect 0.45x1.4 smd: 1(-1.3,4.1) 2(-0.65,4.1) 3(0,4.1) 4(0.65,4.1) 5(1.3,4.1)
  rect 1.4x2.1 smd: 6(-2.462,3.75) 6(2.462,3.75)
  rect 1.175x1.9 smd: 6(-0.835,1.45) 6(0.835,1.45)
  rect 2.5x1.9 smd: 7(-2.9,1.45) 7(2.9,1.45)
  silkscreen extent -3.8,-0.7 3.8,4.3

## Free pads (board coordinates)
  round 0 hole 0.3 unplated: 0(77.1,96.05) 0(77.1,96.55) 0(77.1,97.05) 0(77.1,97.55) 0(94.45,114.85) 0(94.45,78.75) 0(94.95,78.75) 0(94.95,114.85) 0(95.45,78.75) 0(95.45,114.85) 0(95.95,114.85) 0(95.95,78.75) 0(113.2,96.05) 0(113.2,96.55) 0(113.2,97.05) 0(113.2,97.55)

## Via types
v1: diameter 0.45, hole 0.25, Top Layer to Bottom Layer, 394 vias
v2: diameter 0.5, hole 0.3, Top Layer to Bottom Layer, 5 vias
v3: diameter 0.55, hole 0.3, Top Layer to Bottom Layer, 5 vias
v4: diameter 0.45, hole 0.3, Top Layer to Bottom Layer, 3 vias

## Nets (pads, with @x,y where several pads share a name; then routed paths per layer and width w, separated by ;. In a path a pad name is that pad's centre, name@x,y a point inside that pad or via, vN(x,y) a via of type N, cw(c..) or ccw(c..) an arc to the next point about the centre after c; other vN are vias at no path point)
8266_GPIO0: ESP8266.6 U301.1 | length 13.2
  Top Layer w0.15: U301.1@100.45,101.325 v1(100.45,102.55)
  2 w0.15: v1(100.45,102.55) 100.45,107.05 101.45,108.05 101.45,112.7 v1(102.45,113.7)
8266_GPIO2: ESP8266.4
8266_PD: ESP8266.3 U301.4 | length 7.4
  Top Layer w0.15: U301.4@98.95,101.325 v1(98.95,102.3)
  2 w0.15: v1(98.95,102.3) 99.45,102.8 99.45,107.85 v1(99.9,108.3)
8266_RST: ESP8266.5 U301.5 | length 11.6
  Top Layer w0.15: v1(98.45,100.3) U301.5@98.45,101.325 ; v1(100.95,108.3) ESP8266.5@102.46,108.3
  2 w0.15: v1(98.45,100.3) 98.45,101.05 99.95,102.55 99.95,107.3 v1(100.95,108.3)
20608_CS: U301.9 U500.5 | length 8.3
  Top Layer w0.15: v1(93.45,97.8) v1(96.25,97.8) ; v1(96.25,100.15) 96.45,100.35 U301.9@96.45,101.325
  2 w0.15: v1(96.25,97.8) v1(96.25,100.15)
  Bottom Layer w0.15: U500.5@92.652,96.55 93.1,96.55 93.45,96.9 v1(93.45,97.8)
20608_DRDY: U301.8 U500.6 | length 9.7
  Top Layer w0.15: v1(93.95,97.3) 96.45,97.3 v1(96.95,97.8) ; v1(96.95,100.15) U301.8@96.95,101.325
  2 w0.15: v1(96.95,97.8) v1(96.95,100.15)
  Bottom Layer w0.15: U500.6@91.752,96.05 93.1,96.05 93.95,96.9 v1(93.95,97.3)
\R\S\T\: RST.1 U301.14 U505.1 | length 13.1
  Top Layer w0.15: U301.14@93.95,101.325 v1(93.95,103.05)
  Top Layer w0.25: U505.1@92.7,107.95 92.7,112.3 93.2,112.8 RST.1@93.2,113.95
  2 w0.15: v1(92.9,107.75) 93.95,106.7 v1(93.95,103.05)
ALARM: R130.2 U301.77 | length 49.1
  Top Layer w0.15: v1(84.2,107.625) R130.2@84.95,107.625 ; v1(99.95,111.8) 100.45,111.3 v1(103.45,111.3)
  Top Layer w0.2: U301.77@101.975,88.3 v1(103.7,88.3)
  2 w0.15: v1(84.2,107.625) 84.2,110.25 86.5,112.55 99.2,112.55 v1(99.95,111.8) ; v1(103.45,111.3) 103.45,103.35 103.9,102.9 103.9,88.5 v1(103.7,88.3)
BARO_CS: U301.88 U503.5 | length 21.7
  Top Layer w0.15: v1(90.2,93.8) U301.88@101.975,93.8
  Bottom Layer w0.15: U503.5@80.8,93.675 80.925,93.8 82.2,93.8 82.75,93.25 87.4,93.25 87.95,93.8 v1(90.2,93.8)
BATT_CURRENT_SENS: R422.1 U301.26 | length 15.3
  Top Layer w0.15: U301.26@86.925,99.8 86.925,101.025 88.1,102.2 88.1,103.95 v1(87.35,104.7)
  Bottom Layer w0.15: v1(87.35,104.7) 95.425,104.7 R422.1@96.525,105.8
BATT_VOLT_SENS: R423.1 U301.25 | length 10.4
  Top Layer w0.15: U301.25@88.45,101.325 v1(88.45,105.15)
  Bottom Layer w0.15: v1(88.45,105.15) 94.3,105.15 94.6,105.45 R423.1@94.6,105.8
BOOT0: BOOT.1 R301.1 U301.94 | length 3.4
  Top Layer w0.15: U301.94@101.975,96.8 103.25,96.8 104,96.05 R301.1@104.025,96.05 BOOT.1@104.025,94.975
BUZZER+: BUT/BUZ.5 R132.1 | length 3.1
  Bottom Layer w0.25: BUT/BUZ.5@90.65,110.05 R132.1@93.775,110.05
BUZZER-: BUT/BUZ.4 Q100.1 | length 2.1
  Top Layer w0.25: Q100.1@89.7,108.1 v1(89.7,108.55)
  Bottom Layer w0.25: BUT/BUZ.4@89.4,110.05 89.4,108.85 v1(89.7,108.55)
CAN1_RX: U10.4 U301.81 | length 2.4
  Top Layer w0.2: U301.81@101.975,90.3 U10.4@104.4,90.3
CAN1_TX: U10.1 U301.82 | length 5.4
  Top Layer w0.15: U10.1@106.55,90.8 v1(106.95,90.8)
  Top Layer w0.2: U301.82@101.975,90.8 v1(102.95,90.8)
  3 w0.15: v1(102.95,90.8) v1(106.95,90.8)
FMU_CH1: SERVO_1_6.1 U301.45 | length 22
  Top Layer w0.15: U301.45@86.925,90.3 v1(97.7,90.3)
  3 w0.15: v1(97.7,90.3) 98.7,90.3 103.45,95.05 SERVO_1_6.1@106.943,95.05
FMU_CH2: SERVO_1_6.2 U301.44 | length 22.8
  Top Layer w0.15: U301.44@86.925,90.8 v1(97.2,90.8)
  3 w0.15: v1(97.2,90.8) 98.7,90.8 105.492,97.591 SERVO_1_6.2@106.942,97.591
FMU_CH3: SERVO_1_6.3 U301.42 | length 24.7
  Top Layer w0.15: U301.42@86.925,91.8 88.7,91.8 89.2,91.3 v1(97.7,91.3)
  3 w0.15: v1(97.7,91.3) 98.7,91.3 105.9,98.5 105.9,99.85 106.18,100.13 SERVO_1_6.3@106.943,100.13
FMU_CH4: SERVO_1_6.4 U301.40 | length 26.5
  Top Layer w0.15: U301.40@86.925,92.8 88.25,92.8 89.25,91.8 v1(97.2,91.8)
  3 w0.15: v1(97.2,91.8) 98.7,91.8 105.5,98.6 105.5,100.1 106.45,101.05 106.45,102.177 SERVO_1_6.4@106.943,102.67
FMU_CH5: SERVO_1_6.5 U301.60 | length 27.8
  Top Layer w0.15: U301.60@92.95,86.275 v1(92.95,87.3)
  2 w0.15: v1(92.95,87.3) 92.95,91.8 v1(93.45,92.3)
  3 w0.15: v1(93.45,92.3) 98.7,92.3 105.1,98.7 105.1,100.3 105.95,101.15 105.95,103.05 106.45,103.55 106.45,104.717 SERVO_1_6.5@106.943,105.21
FMU_CH6: SERVO_1_6.6 U301.61 | length 29.8
  Top Layer w0.15: U301.61@93.45,86.275 v1(93.45,87.8)
  2 w0.15: v1(93.45,87.8) 93.45,91.65 93.95,92.15 v1(93.95,92.8)
  3 w0.15: v1(93.95,92.8) 98.7,92.8 104.7,98.8 104.7,100.45 105.45,101.2 105.45,103.1 105.95,103.6 105.95,105.55 106.45,106.05 106.45,107.257 SERVO_1_6.6@106.943,107.75
FMU_I2C1_SCL: GPS_PORT.4 R202.2 U301.95 | length 36.9
  Top Layer w0.15: v1(88.2,96.15) 88.85,96.8 92.55,96.8 93.2,96.15 96.85,96.15 98,97.3 100.65,97.3 U301.95@101.975,97.3 103.3,97.3 103.55,97.05 R202.2@104.025,97.05
  3 w0.15: v1(81.95,93.3) v1(81.95,103.8) ; v1(88.2,93.3) v1(88.2,96.15)
  Bottom Layer w0.15: v1(81.95,93.3) 82.35,92.9 87.8,92.9 v1(88.2,93.3)
FMU_I2C1_SDA: GPS_PORT.5 R203.2 U301.96 | length 30.1
  Top Layer w0.15: v1(88.95,97.3) 92.65,97.3 93.45,96.5 96.75,96.5 97.85,97.6 100.5,97.6 100.7,97.8 U301.96@101.975,97.8 102.95,97.8 103.2,98.05 R203.2@104.025,98.05
  2 w0.15: v1(87.8,105.15) 88.45,104.5 88.45,98.05 88.95,97.55 v1(88.95,97.3)
  Bottom Layer w0.15: GPS_PORT.5@82.05,105.15 v1(87.8,105.15)
FMU_LED_BLUE: R113.1 U301.89 | length 23.8
  Top Layer w0.15: R113.1@80.375,96.55 82.3,96.55 82.7,96.15 v1(82.7,95.05) ; v1(91.2,95.8) 99.45,95.8 100.95,94.3 U301.89@101.975,94.3
  2 w0.15: v1(82.7,95.05) 90.45,95.05 v1(91.2,95.8)
FMU_LED_GREEN: R114.1 U301.47 | length 12.9
  Top Layer w0.15: R114.1@80.375,98.25 81.519,98.25 83.6,96.169 83.6,93.2 85.2,91.6 85.2,90.128 86.028,89.3 U301.47@86.925,89.3
FMU_LED_RED: R115.1 U301.48 | length 12.7
  Top Layer w0.15: R115.1@80.375,97.4 81.91,97.4 83.2,96.11 83.2,93.05 84.8,91.45 84.8,90.069 86.069,88.8 U301.48@86.925,88.8
FMU_RC_INPUT: U203.4 U301.35 U301.64 | length 28.2
  Top Layer w0.15: v1(85.7,95.55) 85.95,95.3 U301.35@86.925,95.3 v1(94.2,95.3) ; U301.64@94.95,86.275 v1(94.95,87.3)
  2 w0.15: v1(85.7,95.55) 86.45,96.3 86.45,100.6 86.3,100.75 v1(86.3,105.05) ; v1(94.2,95.3) 94.2,93.8 94.85,93.15 94.85,92 94.4,91.55 94.4,87.85 v1(94.95,87.3)
FMU_SWCLK: JTAG.5 U301.76 | length 6.3
  Top Layer w0.2: U301.76@101.975,87.8 v1(102.95,87.8)
  3 w0.15: v1(102.95,87.8) v1(107.2,87.8)
  Bottom Layer w0.15: v1(107.2,87.8) JTAG.5@108.28,87.8
FMU_SWDIO: JTAG.4 U301.72 | length 11
  Top Layer w0.15: U301.72@98.95,86.275 v1(98.95,87.3)
  3 w0.15: v1(98.95,87.3) 99.95,88.3 106.7,88.3 v1(107.2,88.8)
  Bottom Layer w0.15: v1@107.205,88.805 JTAG.4@108.294,88.805
FMU_UART7_RX: JTAG.3 U301.38 | length 26.5
  Top Layer w0.15: U301.38@86.925,93.8 v1(87.95,93.8) ; v1(88.2,89.3) v1(97.2,89.3)
  2 w0.15: v1(87.95,93.8) 87.95,93.1 88.45,92.6 88.45,90.186 88.2,89.936 v1(88.2,89.3)
  3 w0.15: v1(97.2,89.3) 98.85,89.3 99.85,90.3 102.15,90.3 102.65,89.8 v1(107.2,89.8)
  Bottom Layer w0.15: v1(107.2,89.8) JTAG.3@108.289,89.8
FMU_UART7_TX: JTAG.2 U301.39 | length 28.2
  Top Layer w0.15: U301.39@86.925,93.3 v1(88.45,93.3) ; v1(88.7,89.8) v1(96.7,89.8)
  2 w0.15: v1(88.45,93.3) 88.9,92.85 88.9,90 v1(88.7,89.8)
  3 w0.15: v1(96.7,89.8) 98.8,89.8 99.8,90.8 102.2,90.8 102.7,90.3 v1(109.45,90.3)
  Bottom Layer w0.15: JTAG.2@108.28,90.8 109.25,90.8 109.45,90.6 v1(109.45,90.3)
FMU_USART1_RX: ESP8266.1 U301.93 | length 14.7
  Top Layer w0.15: v1(99.45,96.3) U301.93@101.975,96.3
  2 w0.15: v1(97.7,107.5) 97.7,102.3 98,102 98,100.05 98.45,99.6 98.45,97.55 98.7,97.3 99.2,97.3 99.45,97.05 v1(99.45,96.3)
FMU_USART1_TX: ESP8266.8 U301.92 | length 20.8
  Top Layer w0.15: U301.92@101.975,95.8 v1(102.95,95.8)
  2 w0.15: v1(102.95,95.8) 103.55,96.4 103.55,102.7 102.95,103.3 102.95,112.65 104,113.7 v1(105,113.7)
FMU_USART2_CTS: TELEM1+FRSKY.4 U301.84 | length 11.4
  Top Layer w0.15: v1(99.15,91.8) U301.84@101.975,91.8
  2 w0.15: v1(98.4,83.55) 98.4,87.5 99.15,88.25 v1(99.15,91.8)
FMU_USART2_RTS: TELEM1+FRSKY.5 U301.85 | length 11.2
  Top Layer w0.15: v1(99.65,92.3) U301.85@101.975,92.3
  2 w0.15: v1(99.65,83.55) 99.65,86.7 99.45,86.9 99.45,87.55 99.65,87.75 v1(99.65,92.3)
FMU_USART2_RX: TELEM1+FRSKY.3 U202.3 U301.87 | length 19.9
  Top Layer w0.15: v1(98.65,93.3) U301.87@101.975,93.3
  2 w0.15: v1(97.15,83.55) 97.95,84.35 97.95,87.65 98.65,88.35 v1(98.65,93.3) 98.65,96.5 v1(98.95,96.8)
  3 w0.15: v1(98.95,96.8) 98.95,97.95 99.175,98.175 v1(99.2,98.175)
  Bottom Layer w0.15: v1(99.2,98.175) U202.3@100.3,98.175
FMU_USART2_TX: TELEM1+FRSKY.2 U202.2 U301.86 | length 21.8
  Top Layer w0.15: v1(98.15,92.8) U301.86@101.975,92.8
  2 w0.15: v1(95.9,83.55) 96.3,83.55 97.45,84.7 97.45,87.75 98.15,88.45 v1(98.15,92.8) 98.15,93.6 98.2,93.65 v1(98.2,96.8)
  3 w0.15: v1(98.2,96.8) 98.2,97.825 v1(99.2,98.825)
  Bottom Layer w0.15: v1@99.2,98.825 U202.2@100.3,98.825
FMU_USART3_CTS: TELEM2.4 U301.58 | length 15.4
  Top Layer w0.15: TELEM2.4@81.95,89.775 82.475,89.775 83.375,88.875 83.375,85.975 84,85.35 85.5,85.35 v1(85.95,85.8) ; v1(91.95,85.15) U301.58@91.95,86.275
  2 w0.15: v1(85.95,85.8) 86.4,85.35 86.9,85.35 87.25,85.7 91.4,85.7 v1(91.95,85.15)
FMU_USART3_RTS: TELEM2.5 U301.59 | length 15.5
  Top Layer w0.15: TELEM2.5@81.95,88.525 82.475,88.525 83.05,87.95 83.05,85.75 83.75,85.05 85.95,85.05 v1(86.7,85.8) ; U301.59@92.45,86.275 92.45,85.4 v1(92.7,85.15)
  2 w0.15: v1(86.7,85.8) 86.95,86.05 91.8,86.05 v1(92.7,85.15)
FMU_USART3_RX: TELEM2.3 U301.56 | length 15.5
  Top Layer w0.15: TELEM2.3@81.95,91.025 82.475,91.025 83.1,90.4 83.1,89.65 83.7,89.05 83.7,86.15 84.05,85.8 v1(85.2,85.8) ; v1(85.7,86.8) 87.3,86.8 88.15,87.65 90.5,87.65 90.95,87.2 U301.56@90.95,86.275
  2 w0.15: v1(85.2,85.8) 85.7,86.3 v1(85.7,86.8)
FMU_USART3_TX: TELEM2.2 U301.55 | length 14.9
  Top Layer w0.15: TELEM2.2@81.95,92.275 82.525,92.275 83.1,91.7 83.1,91.05 83.45,90.7 83.45,89.8 84.025,89.225 84.025,86.375 84.15,86.25 87.25,86.25 88.3,87.3 90.3,87.3 90.45,87.15 U301.55@90.45,86.275
FMU_USART4_RX: GPS_PORT.3 U301.24 | length 9.2
  Top Layer w0.15: v1(87.95,101.3) 87.95,100.6 88.25,100.3 88.75,100.3 88.95,100.5 U301.24@88.95,101.325
  Bottom Layer w0.15: GPS_PORT.3@81.95,102.55 82.5,102.55 83.75,101.3 v1(87.95,101.3)
FMU_USART4_TX: GPS_PORT.2 U301.23 | length 9.4
  Top Layer w0.15: v1(87.45,100.8) 87.45,100.5 88,99.95 89.05,99.95 89.45,100.35 U301.23@89.45,101.325
  Bottom Layer w0.15: GPS_PORT.2@81.95,101.3 83.25,101.3 83.6,100.95 87.3,100.95 v1(87.45,100.8)
FMU_USART8_RX: OSD.3 U301.97 | length 27.4
  Top Layer w0.15: v1(89.45,97.8) 92.75,97.8 93.7,96.85 96.65,96.85 97.75,97.95 100.4,97.95 100.75,98.3 U301.97@101.975,98.3
  2 w0.15: v1@86.95,109.8 88.4,109.8 88.7,109.5 88.7,108.25 89.45,107.5 v1(89.45,97.8)
  other v1: 87,109.8
FMU_USART8_TX: OSD.2 U301.98 | length 24.5
  Top Layer w0.15: v1(88.95,98.25) 100.25,98.25 100.8,98.8 U301.98@101.975,98.8
  2 w0.15: v1(88.225,109.2) 88.225,108.175 88.95,107.45 v1(88.95,98.25)
FMU_VDD_3V3: 3V3.1 BUT/BUZ.3 C301.2 C310.2 C311.2 C312.2 C313.2 C314.2 C315.2 C316.2 C318.2 C319.2 C402.1 C505.2 JTAG.1 LED100.4 R202.1 R203.1 R401.2 R410.2 R411.2 R412.2 R413.2 U10.5 U202.8 U203.5 U301.6 U301.11 U301.19 U301.21 U301.22 U301.28 U301.50 U301.75 U301.100 U302.3 U302.7 U302.8 U304.5 U505.2 uSD401.4 | length 117.5
  Top Layer w0.15: C310.2@104.175,99.8 104.65,99.8 104.875,99.575 R203.1@104.875,98.05 R202.1@104.875,97.05
  Top Layer w0.2: v1(88.2,94.55) 88.95,93.8 88.95,93.35 ; C316.2@90.275,103.05 C315.2@90.275,104.05 ; U301.100@101.5,99.8 101.5,100.2 ; U301.100@101.9,99.8 101.9,100.2 ; U301.100@102.3,99.8 102.3,100.2 ; U301.100@102.7,99.8 102.7,100.2 ; 3V3.1@104.45,93.3 v1(105.45,93.3)
  Top Layer w0.25: C314.2@84.65,87.8 87.75,87.8 88.225,88.275 ; C312.2@85.4,98.8 v1(85.95,98.8) ; U301.28@86.925,98.8 88.45,98.8 ; 89.95,100.05 U301.22@89.95,101.325 89.95,102.725 C316.2@90.275,103.05 ; 90.45,100.05 U301.21@90.45,101.325 C316.2@90.45,103.05 ; 91.45,100.05 U301.19@91.45,101.325 ; v1(95.45,100.15) U301.11@95.45,101.325 C313.2@95.45,102.9 ; 97.95,100.05 U301.6@97.95,101.325 ; U301.75@100.45,86.275 100.45,87.5 ; U301.75@100.45,86.3 C311.2@101.775,86.3 101.775,87.25 ; U301.75@100.45,86.8 101.775,86.8 ; 100.45,87.275 103.475,87.275 103.75,87.55 U10.5@104.475,87.55 ; 100.45,99.8 U301.100@101.975,99.8 C310.2@103.85,99.8 ; 101.1,86.3 101.1,87.25
  Top Layer w0.3: v1(85.95,98.8) U301.28@86.925,98.8 ; U505.2@94.425,107.525 C505.2@95.45,107.525
  2 w0.2: v1(77.675,96.675) 80.325,96.675 82.45,94.55 v1(88.2,94.55) ; v1@85.75,105.8 85.75,101.05 85.3,100.6 85.3,99.45 v1(85.95,98.8)
  2 w0.25: v1@85.75,105.8 85.75,110.35 86.15,110.75 87.6,110.75 v1(88.15,111.3) ; v1(94.95,107.525) 95.45,107.025 v1(95.45,100.15)
  3 w0.3: v1(85.7,81.55) v1(87.7,81.55) ; v1(95.7,99.475) 96.2,98.975 v1(96.2,95.975)
  Bottom Layer w0.2: v1(95.7,99.475) U202.8@96.7,99.475
  Bottom Layer w0.25: BUT/BUZ.3@88.15,110.05 v1(88.15,111.3)
  Bottom Layer w0.3: U302.8@84.2,83.455 U302.7@84.2,82.185 85.415,82.185 85.7,81.9 v1(85.7,81.55) ; v1(87.7,81.55) 87.7,81.2 87.985,80.915 U302.3@89.2,80.915 92.565,80.915 93.05,81.4 93.05,84.4 93.35,84.7 93.35,86.9 v1(92.45,87.8) ; v1(96.2,95.975) 100.127,95.975 ; uSD401.4@100.127,93.35 100.127,95.975 ; JTAG.1@108.294,91.776 105.723,91.776 105.45,92.05 v1(105.45,93.3) 105.45,95.6 105.075,95.975 R401.2@104.527,95.975 100.127,95.975
  other v1: 96.7,87.8 95.95,88.3 95.2,88.8 96.7,88.8 95.45,92.3 96.45,92.3 95.95,92.8 95.45,93.3 96.45,93.3 94.95,98.8 95.7,98.8 97.95,98.8 97.45,99.55 85.75,105.7
FRAM_CS: U301.57 U302.1 | length 3.7
  Top Layer w0.15: v1(91.2,85.15) 91.45,85.4 U301.57@91.45,86.275
  Bottom Layer w0.15: U302.1@89.7,83.5 89.7,83.95 90.9,85.15 v1(91.2,85.15)
FRAM_MISO: U301.53 U302.2 | length 5.9
  Top Layer w0.15: v1(89.45,85.15) U301.53@89.45,86.275
  Bottom Layer w0.15: U302.2@89.2,82.185 88.065,82.185 87.9,82.35 87.9,83.6 v1(89.45,85.15)
FRAM_MOSI: U301.54 U302.5 | length 10.7
  Top Layer w0.15: U301.54@89.95,86.275 89.95,85.4 v1(90.2,85.15)
  3 w0.15: v1(88.2,84.55) v1(89.6,84.55)
  Bottom Layer w0.15: U302.5@84.2,79.645 85.345,79.645 87.2,81.5 87.2,83.55 v1(88.2,84.55) ; v1(89.6,84.55) v1(90.2,85.15)
FRAM_SCK: U301.52 U302.6 | length 8.8
  Top Layer w0.15: v1(88.7,85.15) 88.95,85.4 U301.52@88.95,86.275
  Bottom Layer w0.15: U302.6@84.2,80.915 85.915,80.915 86.7,81.7 86.7,83.9 87.95,85.15 88.55,85.15 v1@88.7,85.3
FRSKY_IN: R454.1 TELEM1+FRSKY.8 | length 25.2
  Top Layer w0.15: v1(94.95,80.55) 96.45,80.55 96.7,80.3 101.1,80.3 103.4,82.6 TELEM1+FRSKY.8@103.4,83.55
  Bottom Layer w0.15: v1(94.95,80.55) 94.95,94.625 R454.1@95.45,95.125
FRSKY_OUT: R452.1 TELEM1+FRSKY.7 | length 23.6
  Top Layer w0.15: v1(94.45,81.05) 96.7,81.05 96.95,80.8 100.4,80.8 102.15,82.55 TELEM1+FRSKY.7@102.15,83.55
  Bottom Layer w0.15: v1(94.45,81.05) R452.1@94.45,95.125